# EAGLE board Multi-LED Digital Controller with On-Off Switch React   0 (EAGLE 9.7.0)

Size 82.4 x 136.85 mm. Coordinates in mm from the lower left corner, seen from the top.
Outline: 0,0 82.4,0 82.4,136.85 0,136.85 0,0
Copper layers (1*16): Top 0.035mm / dielectric 1.5mm / Bottom 0.035mm
Design rules "default": minimum track width 6mil, minimum drill 0.35mm, track to track 6mil, track to pad 6mil, pad to pad 6mil, via to via 6mil, smd to smd 6mil, copper to edge 40mil, drill to drill 6mil, minimum pad ring 10mil, minimum via ring 8mil, stop-mask expansion 4mil, vias tented up to drill 0mil, thermal gap 10mil

## Footprints (pad centres in the part's own frame; a part is rotated, then mirrored left to right if it is on the bottom)
LEDRD254W60D565H860B_B = drill 0.981 pad 1.581: 1 -1.27,0; 2 1.27,0
LEDRD254W60D565H860B = drill 0.981 pad 1.581: 1 -1.27,0; 2 1.27,0
LEDRD254W60D565H860B_O = drill 0.981 pad 1.581: 1 -1.27,0; 2 1.27,0
LEDRD254W60D565H860B_G = drill 0.981 pad 1.581: 1 -1.27,0; 2 1.27,0
RESAD1016W63L850D250B = drill 0.83 pad 1.43: 1 -5.08,0; 2 5.08,0
SWITCH-SPDT-PTH-8.5X3.7MM = drill 1.016 pad 1.88: 1 -2.54,0; 2 0,0; 3 2.54,0
ARDUINO-UNO-R3-SHIELD = drill 1.016 pad 1.88: 3.3V 24.13,-2.54; 5V 24.13,0; A0 24.13,12.7; A1 24.13,15.24; A2 24.13,17.78; A3 24.13,20.32; A4 24.13,22.86; A5 24.13,25.4; AREF -24.13,-13.97; D2 -24.13,20.32; D3 -24.13,17.78; D4 -24.13,15.24; D5 -24.13,12.7; D6 -24.13,10.16; D7 -24.13,7.62; D8 -24.13,3.81; D9 -24.13,1.27; D10 -24.13,-1.27; D11 -24.13,-3.81; D12 -24.13,-6.35; D13 -24.13,-8.89; GND@0 24.13,2.54; GND@1 24.13,5.08; GND@2 -24.13,-11.43; IOREF 24.13,-7.62; NC 24.13,-10.16; RES 24.13,-5.08; RX -24.13,25.4; SCL -24.13,-19.05; SDA -24.13,-16.51; TX -24.13,22.86; VIN 24.13,7.62

## Placement (x,y rotation side)
D1  BLUE  [LEDRD254W60D565H860B_B]  74.33,111.16 180 top
D2  RED  [LEDRD254W60D565H860B]  66.71,111.16 180 top
D3  ORANGE  [LEDRD254W60D565H860B_O]  59.09,111.16 180 top
D4  GREEN  [LEDRD254W60D565H860B_G]  51.47,111.16 180 top
D5  BLUE  [LEDRD254W60D565H860B_B]  43.85,111.16 180 top
D6  RED  [LEDRD254W60D565H860B]  36.23,111.16 180 top
D7  ORANGE  [LEDRD254W60D565H860B_O]  28.61,111.16 180 top
D8  GREEN  [LEDRD254W60D565H860B_G]  20.99,111.16 180 top
D9  GREEN  [LEDRD254W60D565H860B_G]  51.47,128.94 180 top
D10  RED  [LEDRD254W60D565H860B]  66.71,128.94 180 top
D11  ORANGE  [LEDRD254W60D565H860B_O]  59.09,128.94 180 top
D12  GREEN  [LEDRD254W60D565H860B_G]  20.99,128.94 180 top
D13  RED  [LEDRD254W60D565H860B]  36.23,128.94 180 top
D14  ORANGE  [LEDRD254W60D565H860B_O]  28.61,128.94 180 top
D15  BLUE  [LEDRD254W60D565H860B_B]  43.85,128.94 180 top
D16  BLUE  [LEDRD254W60D565H860B_B]  74.33,128.94 180 top
R1  220  [RESAD1016W63L850D250B]  73.06,103.54 90 top
R2  220  [RESAD1016W63L850D250B]  65.44,103.54 90 top
R3  220  [RESAD1016W63L850D250B]  57.82,103.54 90 top
R4  220  [RESAD1016W63L850D250B]  50.2,103.54 90 top
R5  220  [RESAD1016W63L850D250B]  42.58,103.54 90 top
R6  220  [RESAD1016W63L850D250B]  34.96,103.54 90 top
R7  220  [RESAD1016W63L850D250B]  27.34,103.54 90 top
R8  220  [RESAD1016W63L850D250B]  19.72,103.54 90 top
R9  220  [RESAD1016W63L850D250B]  73.06,121.32 90 top
R10  220  [RESAD1016W63L850D250B]  65.44,121.32 90 top
R11  220  [RESAD1016W63L850D250B]  57.82,121.32 90 top
R12  220  [RESAD1016W63L850D250B]  50.2,121.32 90 top
R13  220  [RESAD1016W63L850D250B]  42.58,121.32 90 top
R14  220  [RESAD1016W63L850D250B]  34.96,121.32 90 top
R15  220  [RESAD1016W63L850D250B]  27.34,121.32 90 top
R16  220  [RESAD1016W63L850D250B]  19.72,121.32 90 top
S1  TOGGLE  [SWITCH-SPDT-PTH-8.5X3.7MM]  9.56,108.62 0 top
U1  ARDUINO-UNO-R3-SHIELD  [ARDUINO-UNO-R3-SHIELD]  47.88,29.84 270 top

## Library data of the parts
D1 D5 D15 D16 = Tinkercad; CATEGORY: Opto-Electronic; SUB-CATEGORY: LED; VALUE: LED_BLUE
D2 D6 D10 D13 = Tinkercad; CATEGORY: Opto-Electronic; SUB-CATEGORY: LED; VALUE: LED_RED
D3 D7 D11 D14 = Tinkercad; CATEGORY: Opto-Electronic; SUB-CATEGORY: LED; VALUE: LED_ORANGE
D4 D8 D9 D12 = Tinkercad; CATEGORY: Opto-Electronic; SUB-CATEGORY: LED; VALUE: LED_GREEN
R1-R16 S1 U1 = Tinkercad

## Nets
D1_C: D1.2 R1.2 R9.1
D2_C: D2.2 R2.2 R10.1
D3_C: D3.2 R3.2 R11.1
D4_C: D4.2 R4.2 R12.1
D5_C: D5.2 R5.2 R13.1
D6_C: D6.2 R6.2 R14.1
D7_C: D7.2 R7.2 R15.1
D8_C: D8.2 R8.2 R16.1
D9_C: D9.2 R12.2
D10_C: D10.2 R10.2
D11_C: D11.2 R11.2
D12_C: D12.2 R16.2
D13_C: D13.2 R14.2
D14_C: D14.2 R15.2
D15_C: D15.2 R13.2
D16_C: D16.2 R9.2
U1_D2: D1.1 D16.1 U1.D2
U1_D3: D2.1 D10.1 U1.D3
U1_D4: D3.1 D11.1 U1.D4
U1_D5: D4.1 D9.1 U1.D5
U1_D6: D5.1 D15.1 U1.D6
U1_D7: D6.1 D13.1 U1.D7
U1_D8: D7.1 D14.1 U1.D8
U1_D9: D8.1 D12.1 U1.D9
U1_D10: S1.1 U1.D10
U1_GND: R1.1 R2.1 R3.1 R4.1 R5.1 R6.1 R7.1 R8.1 S1.2 U1.GND@0 U1.GND@1 U1.GND@2

## Tracks (layer width: path | path; a pad name or v marks a point on that pad's centre or on a via)
D1_C  (2 unrouted)
D2_C  (2 unrouted)
D3_C  (2 unrouted)
D4_C  (2 unrouted)
D5_C  (2 unrouted)
D6_C  (2 unrouted)
D7_C  (2 unrouted)
D8_C  (2 unrouted)
D9_C  (1 unrouted)
D10_C  (1 unrouted)
D11_C  (1 unrouted)
D12_C  (1 unrouted)
D13_C  (1 unrouted)
D14_C  (1 unrouted)
D15_C  (1 unrouted)
D16_C  (1 unrouted)
U1_D2  (2 unrouted)
U1_D3  (2 unrouted)
U1_D4  (2 unrouted)
U1_D5  (2 unrouted)
U1_D6  (2 unrouted)
U1_D7  (2 unrouted)
U1_D8  (2 unrouted)
U1_D9  (2 unrouted)
U1_D10  (1 unrouted)
U1_GND  (11 unrouted)